# EAGLE board 13350-Spectacle_Director_Board-panel.v10 (EAGLE 7.5.0), part 1 of 4
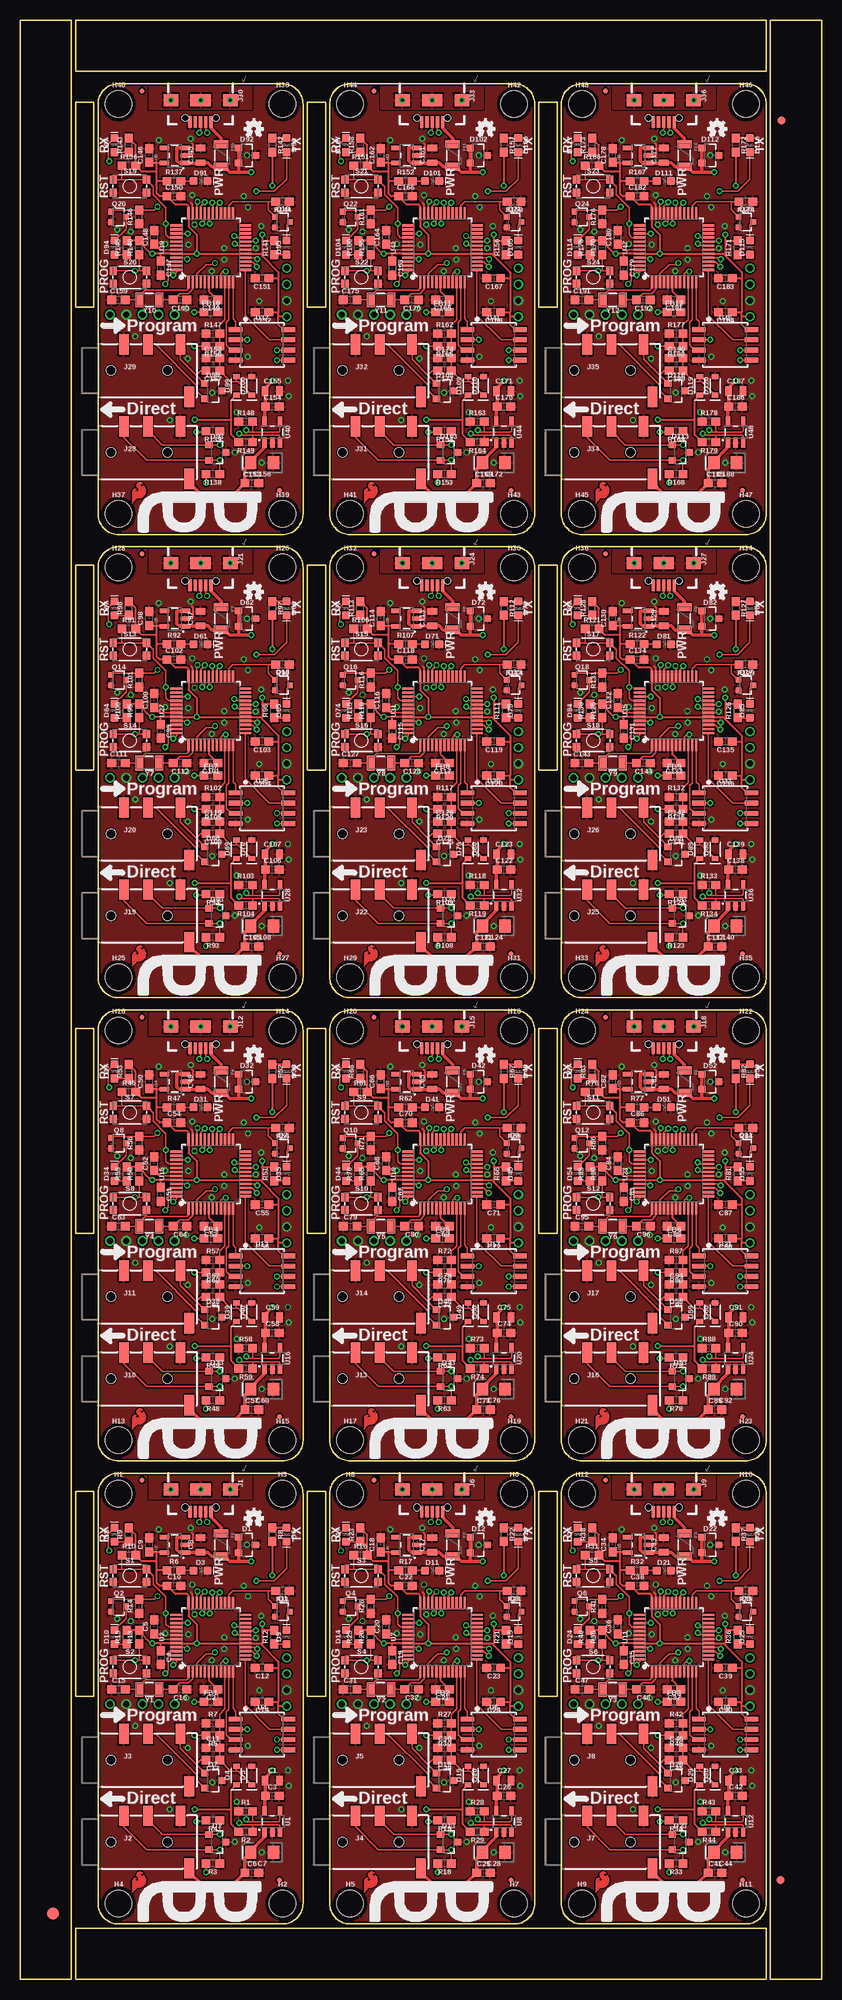
[diagram p0: board, top side]
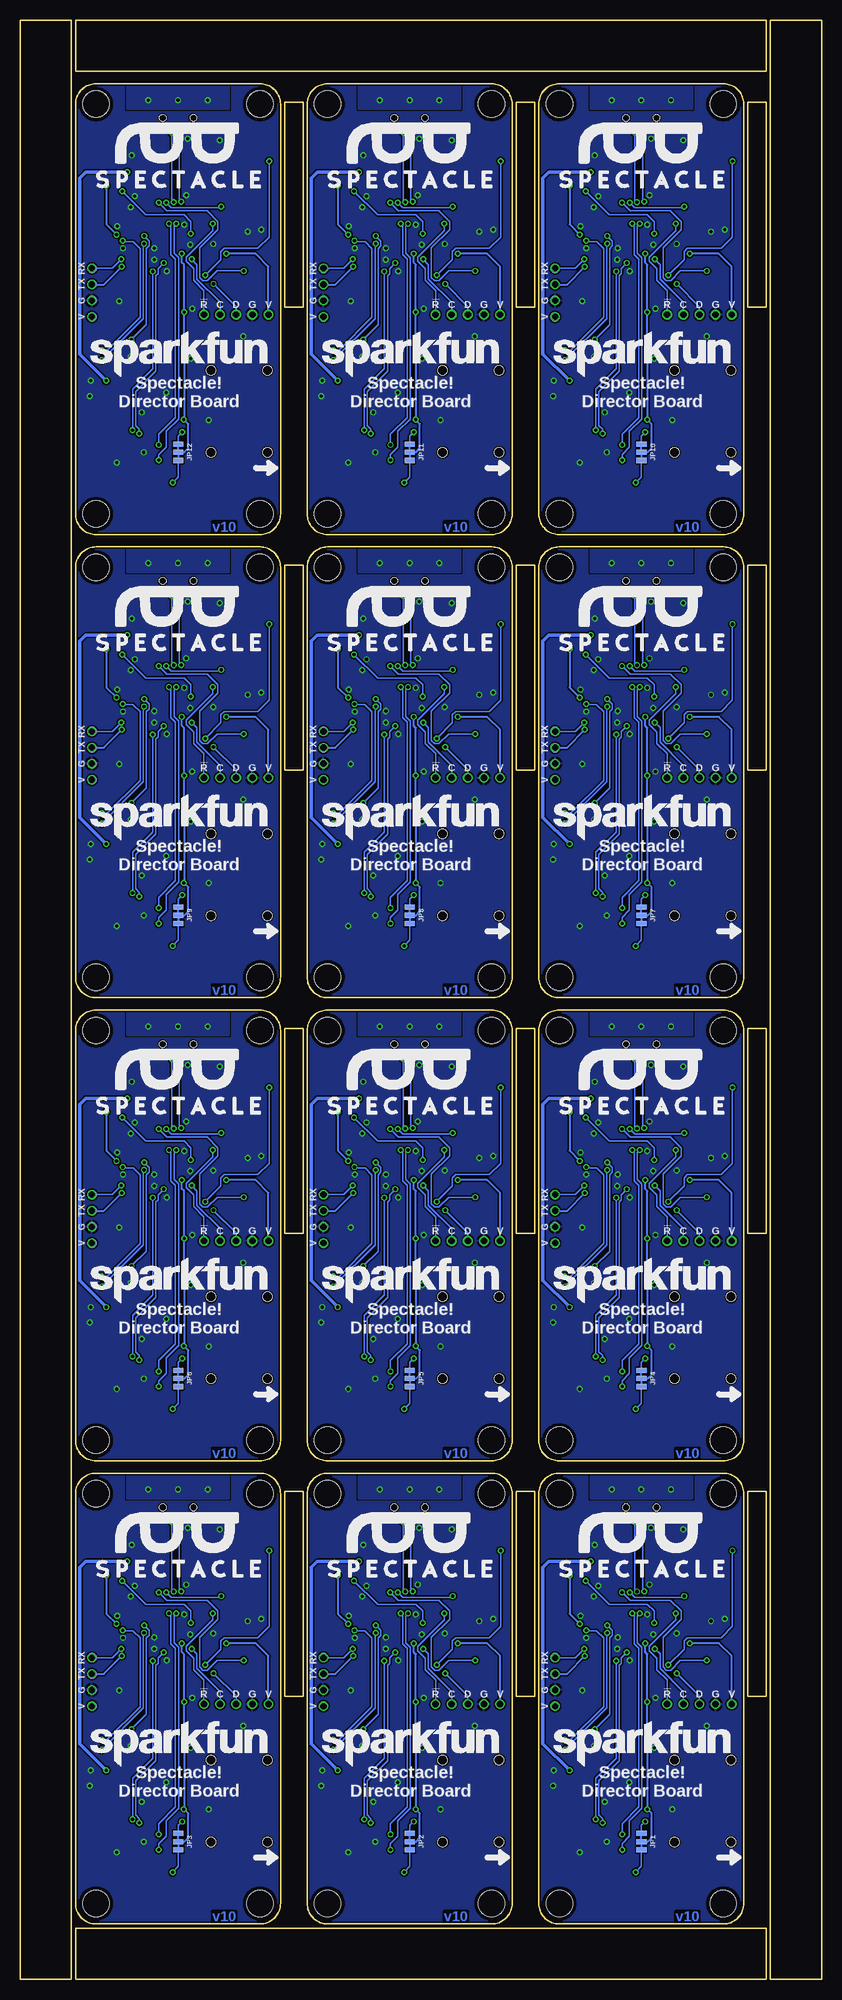
[diagram p1: board, bottom side, seen from below]

Size 99.31 x 242.82 mm. Coordinates in mm from the lower left corner, seen from the top.
Outline: 6.35,78.99 6.35,0 0,0 0,29.46
Outline: 0,26.92 0,242.82 6.35,242.82 6.35,76.45
Outline: 79.25,0 6.86,0 6.86,6.35 29.72,6.35
Outline: 27.18,6.35 92.46,6.35 92.46,0 76.71,0
Outline: 20.32,242.82 92.46,242.82 92.46,236.47 69.85,236.47
Outline: 72.39,236.47 6.86,236.47 6.86,242.82 22.86,242.82
Outline: 92.96,170.43 92.96,242.82 99.31,242.82 99.31,219.96
Outline: 99.31,222.5 99.31,0 92.96,0 92.96,172.97
Outline: 32.51,6.86 12.19,6.86 arc-90 9.65,9.4 9.65,60.2 arc-90 12.19,62.74 32.51,62.74 arc-90 35.05,60.2 35.05,9.4 arc-90 32.51,6.86
Outline: 9.14,35.05 9.14,60.45 6.86,60.45 6.86,35.05 9.14,35.05
Outline: 61.21,6.86 40.89,6.86 arc-90 38.35,9.4 38.35,60.2 arc-90 40.89,62.74 61.21,62.74 arc-90 63.75,60.2 63.75,9.4 arc-90 61.21,6.86
Outline: 37.85,35.05 37.85,60.45 35.56,60.45 35.56,35.05 37.85,35.05
Outline: 89.92,6.86 69.6,6.86 arc-90 67.06,9.4 67.06,60.2 arc-90 69.6,62.74 89.92,62.74 arc-90 92.46,60.2 92.46,9.4 arc-90 89.92,6.86
Outline: 66.55,35.05 66.55,60.45 64.26,60.45 64.26,35.05 66.55,35.05
Outline: 32.51,64.26 12.19,64.26 arc-90 9.65,66.8 9.65,117.6 arc-90 12.19,120.14 32.51,120.14 arc-90 35.05,117.6 35.05,66.8 arc-90 32.51,64.26
Outline: 9.14,92.46 9.14,117.86 6.86,117.86 6.86,92.46 9.14,92.46
Outline: 61.21,64.26 40.89,64.26 arc-90 38.35,66.8 38.35,117.6 arc-90 40.89,120.14 61.21,120.14 arc-90 63.75,117.6 63.75,66.8 arc-90 61.21,64.26
Outline: 37.85,92.46 37.85,117.86 35.56,117.86 35.56,92.46 37.85,92.46
Outline: 89.92,64.26 69.6,64.26 arc-90 67.06,66.8 67.06,117.6 arc-90 69.6,120.14 89.92,120.14 arc-90 92.46,117.6 92.46,66.8 arc-90 89.92,64.26
Outline: 66.55,92.46 66.55,117.86 64.26,117.86 64.26,92.46 66.55,92.46
Outline: 32.51,121.67 12.19,121.67 arc-90 9.65,124.21 9.65,175.01 arc-90 12.19,177.55 32.51,177.55 arc-90 35.05,175.01 35.05,124.21 arc-90 32.51,121.67
Outline: 9.14,149.86 9.14,175.26 6.86,175.26 6.86,149.86 9.14,149.86
Outline: 61.21,121.67 40.89,121.67 arc-90 38.35,124.21 38.35,175.01 arc-90 40.89,177.55 61.21,177.55 arc-90 63.75,175.01 63.75,124.21 arc-90 61.21,121.67
Outline: 37.85,149.86 37.85,175.26 35.56,175.26 35.56,149.86 37.85,149.86
Outline: 89.92,121.67 69.6,121.67 arc-90 67.06,124.21 67.06,175.01 arc-90 69.6,177.55 89.92,177.55 arc-90 92.46,175.01 92.46,124.21 arc-90 89.92,121.67
Outline: 66.55,149.86 66.55,175.26 64.26,175.26 64.26,149.86 66.55,149.86
Outline: 32.51,179.07 12.19,179.07 arc-90 9.65,181.61 9.65,232.41 arc-90 12.19,234.95 32.51,234.95 arc-90 35.05,232.41 35.05,181.61 arc-90 32.51,179.07
Outline: 9.14,207.26 9.14,232.66 6.86,232.66 6.86,207.26 9.14,207.26
Outline: 61.21,179.07 40.89,179.07 arc-90 38.35,181.61 38.35,232.41 arc-90 40.89,234.95 61.21,234.95 arc-90 63.75,232.41 63.75,181.61 arc-90 61.21,179.07
Outline: 37.85,207.26 37.85,232.66 35.56,232.66 35.56,207.26 37.85,207.26
Outline: 89.92,179.07 69.6,179.07 arc-90 67.06,181.61 67.06,232.41 arc-90 69.6,234.95 89.92,234.95 arc-90 92.46,232.41 92.46,181.61 arc-90 89.92,179.07
Outline: 66.55,207.26 66.55,232.66 64.26,232.66 64.26,207.26 66.55,207.26
Copper layers (1*16): Top 0.035mm / dielectric 1.5mm / Bottom 0.035mm
Design rules "SparkFun-2-layer-TIGHT": minimum track width 7mil, minimum drill 15mil, track to track 7mil, track to pad 7mil, pad to pad 7mil, via to via 7mil, smd to smd 7mil, copper to edge 7mil, drill to drill 7mil, minimum pad ring 7mil, minimum via ring 7mil, stop-mask expansion 4mil, vias tented up to drill 25mil, thermal gap 10mil

## Footprints (pad centres in the part's own frame; a part is rotated, then mirrored left to right if it is on the bottom)
0805 = smd 0.8 x 1.2: 1 -0.9,0; 2 0.9,0
0603 = smd 1.1 x 1: 1 -0.85,0; 2 0.85,0
EIA3216 = smd 1.4 x 1.6: + 1.4,0; - -1.4,0
SOT23-3 = smd 0.8 x 0.9: 1 -0.95,-1; 2 0.95,-1; 3 0,1.1
LED-0603 = smd 1 x 1: A -0.877,0; C 0.877,0
SOD-323 = smd 0.63 x 0.83: A 1.15,0; C -1.15,0
FIDUCIAL-1.5X3 = smd 1.5 x 1.5: 1 0,0
FIDUCIAL-1X2 = smd 1 x 1: 1 0,0
PTC-1206 = smd 1 x 1.8: 1 -1.4,0; 2 1.4,0
FIDUCIAL-MICRO = smd 0.635 x 0.635: 1 0,0
STAND-OFF = hole 3.302: 0,0
USB-B-MICRO-SMD = smd 1.45 x 0.4: D+ 2.725,0; D- 2.725,0.65; GND 2.725,-1.3; ID 2.725,-0.65; VBUS 2.725,1.3 | smd 1.5 x 1.8: SHIELD1 0,3.685; SHIELD2 0,-3.685 | smd 1.5 x 2.5: SHIELD3 0,0 | hole 0.85: 2.2,1.9; 2.2,-1.9
AUDIO_JACK_3.5MM_TRRS_SMD_RA = smd 1.2 x 2.5: EARTH 11.3,-3.25; RING1 6.2,3.25; RING2 3.2,3.25; TIP 10.2,3.25 | hole 1.2: 1.6,0; 8.6,0
SMT-JUMPER_3_2-NC_TRACE_NO-SILK = smd 0.635 x 1.27: 1 -1.016,0; 2 0,0; 3 1.016,0
SOT323 = smd 0.7 x 0.7: 1 -0.65,-0.925; 2 0.65,-0.925; 3 0,0.925
TACTILE_SWITCH_SMD_4.6X2.8MM = smd 0.9 x 1: 1 -2.05,-0.8; 2 2.05,-0.8; 3 2.05,0.8; 4 -2.05,0.8
PAD.03X.05 = smd 1.27 x 1.27: P$1 0,0
SOT23-5 = smd 0.55 x 1.2: 1 -0.95,-1.3; 2 0,-1.3; 3 0.95,-1.3; 4 0.95,1.3; 5 -0.95,1.3
TQFP-48 = smd 1.5 x 0.28: 1 -4.25,2.75; 2 -4.25,2.25; 3 -4.25,1.75; 4 -4.25,1.25; 5 -4.25,0.75; 6 -4.25,0.25; 7 -4.25,-0.25; 8 -4.25,-0.75; 9 -4.25,-1.25; 10 -4.25,-1.75; 11 -4.25,-2.25; 12 -4.25,-2.75; 25 4.25,-2.75; 26 4.25,-2.25; 27 4.25,-1.75; 28 4.25,-1.25; 29 4.25,-0.75; 30 4.25,-0.25; 31 4.25,0.25; 32 4.25,0.75; 33 4.25,1.25; 34 4.25,1.75; 35 4.25,2.25; 36 4.25,2.75 | smd 0.28 x 1.5: 13 -2.75,-4.25; 14 -2.25,-4.25; 15 -1.75,-4.25; 16 -1.25,-4.25; 17 -0.75,-4.25; 18 -0.25,-4.25; 19 0.25,-4.25; 20 0.75,-4.25; 21 1.25,-4.25; 22 1.75,-4.25; 23 2.25,-4.25; 24 2.75,-4.25; 37 2.75,4.25; 38 2.25,4.25; 39 1.75,4.25; 40 1.25,4.25; 41 0.75,4.25; 42 0.25,4.25; 43 -0.25,4.25; 44 -0.75,4.25; 45 -1.25,4.25; 46 -1.75,4.25; 47 -2.25,4.25; 48 -2.75,4.25
SOIC-8 = smd 0.61 x 1.702: 1 -1.905,-3.251; 2 -0.635,-3.251; 3 0.635,-3.251; 4 1.905,-3.251; 5 1.905,3.251; 6 0.635,3.251; 7 -0.635,3.251; 8 -1.905,3.251
CRYSTAL-SMD-3.2X1.5MM = smd 1 x 1.8: P$1 -1.25,0; P$2 1.25,0

## Placement (x,y rotation side)
C1  10uF  [0805]  31.24,24.64 0 top
C2  0.1uF  [0603]  23.62,35.94 180 top
C3  0.1uF  [0603]  31.24,22.73 0 top
C4  0.1uF  [0603]  17.4,39.88 270 top
C5  0.1uF  [0603]  16.64,43.69 90 top
C6  0.1uF  [0603]  28.7,13.21 0 top
C7  10uF  [EIA3216]  29.97,15.75 180 top
C8  1.0uF  [0805]  22.35,53.85 90 top
C9  2.2uF  [0603]  16,53.85 90 top
C10  0.1uF  [0603]  19.05,48.77 0 top
C11  47pF  [0603]  23.88,28.7 0 top
C12  0.1uF  [0603]  29.97,38.61 180 top
C13  0.22uF  [0603]  23.88,27.18 180 top
C14  0.1uF  [0603]  29.97,34.42 180 top
C15  15pF  [0603]  12.19,35.94 0 top
C16  15pF  [0603]  19.81,35.94 180 top
C17  1.0uF  [0805]  51.05,53.85 90 top
C18  2.2uF  [0603]  44.7,53.85 90 top
C19  0.1uF  [0603]  46.1,39.88 270 top
C20  0.1uF  [0603]  45.34,43.69 90 top
C21  0.1uF  [0603]  52.32,35.94 180 top
C22  0.1uF  [0603]  47.75,48.77 0 top
C23  0.1uF  [0603]  58.67,38.61 180 top
C24  0.1uF  [0603]  58.67,34.42 180 top
C25  0.1uF  [0603]  57.4,13.21 0 top
C26  0.1uF  [0603]  59.94,22.73 0 top
C27  10uF  [0805]  59.94,24.64 0 top
C28  10uF  [EIA3216]  58.67,15.75 180 top
C29  0.22uF  [0603]  52.58,27.18 180 top
C30  47pF  [0603]  52.58,28.7 0 top
C31  15pF  [0603]  40.89,35.94 0 top
C32  15pF  [0603]  48.51,35.94 180 top
C33  1.0uF  [0805]  79.76,53.85 90 top
C34  2.2uF  [0603]  73.41,53.85 90 top
C35  0.1uF  [0603]  74.8,39.88 270 top
C36  0.1uF  [0603]  74.04,43.69 90 top
C37  0.1uF  [0603]  81.03,35.94 180 top
C38  0.1uF  [0603]  76.45,48.77 0 top
C39  0.1uF  [0603]  87.38,38.61 180 top
C40  0.1uF  [0603]  87.38,34.42 180 top
C41  0.1uF  [0603]  86.11,13.21 0 top
C42  0.1uF  [0603]  88.65,22.73 0 top
C43  10uF  [0805]  88.65,24.64 0 top
C44  10uF  [EIA3216]  87.38,15.75 180 top
C45  0.22uF  [0603]  81.28,27.18 180 top
C46  47pF  [0603]  81.28,28.7 0 top
C47  15pF  [0603]  69.6,35.94 0 top
C48  15pF  [0603]  77.22,35.94 180 top
C49  1.0uF  [0805]  22.35,111.25 90 top
C50  2.2uF  [0603]  16,111.25 90 top
C51  0.1uF  [0603]  17.4,97.28 270 top
C52  0.1uF  [0603]  16.64,101.09 90 top
C53  0.1uF  [0603]  23.62,93.34 180 top
C54  0.1uF  [0603]  19.05,106.17 0 top
C55  0.1uF  [0603]  29.97,96.01 180 top
C56  0.1uF  [0603]  29.97,91.82 180 top
C57  0.1uF  [0603]  28.7,70.61 0 top
C58  0.1uF  [0603]  31.24,80.14 0 top
C59  10uF  [0805]  31.24,82.04 0 top
C60  10uF  [EIA3216]  29.97,73.15 180 top
C61  0.22uF  [0603]  23.88,84.58 180 top
C62  47pF  [0603]  23.88,86.11 0 top
C63  15pF  [0603]  12.19,93.34 0 top
C64  15pF  [0603]  19.81,93.34 180 top
C65  1.0uF  [0805]  51.05,111.25 90 top
C66  2.2uF  [0603]  44.7,111.25 90 top
C67  0.1uF  [0603]  46.1,97.28 270 top
C68  0.1uF  [0603]  45.34,101.09 90 top
C69  0.1uF  [0603]  52.32,93.34 180 top
C70  0.1uF  [0603]  47.75,106.17 0 top
C71  0.1uF  [0603]  58.67,96.01 180 top
C72  0.1uF  [0603]  58.67,91.82 180 top
C73  0.1uF  [0603]  57.4,70.61 0 top
C74  0.1uF  [0603]  59.94,80.14 0 top
C75  10uF  [0805]  59.94,82.04 0 top
C76  10uF  [EIA3216]  58.67,73.15 180 top
C77  0.22uF  [0603]  52.58,84.58 180 top
C78  47pF  [0603]  52.58,86.11 0 top
C79  15pF  [0603]  40.89,93.34 0 top
C80  15pF  [0603]  48.51,93.34 180 top
C81  1.0uF  [0805]  79.76,111.25 90 top
C82  2.2uF  [0603]  73.41,111.25 90 top
C83  0.1uF  [0603]  74.8,97.28 270 top
C84  0.1uF  [0603]  74.04,101.09 90 top
C85  0.1uF  [0603]  81.03,93.34 180 top
C86  0.1uF  [0603]  76.45,106.17 0 top
C87  0.1uF  [0603]  87.38,96.01 180 top
C88  0.1uF  [0603]  87.38,91.82 180 top
C89  0.1uF  [0603]  86.11,70.61 0 top
C90  0.1uF  [0603]  88.65,80.14 0 top
C91  10uF  [0805]  88.65,82.04 0 top
C92  10uF  [EIA3216]  87.38,73.15 180 top
C93  0.22uF  [0603]  81.28,84.58 180 top
C94  47pF  [0603]  81.28,86.11 0 top
C95  15pF  [0603]  69.6,93.34 0 top
C96  15pF  [0603]  77.22,93.34 180 top
C97  1.0uF  [0805]  22.35,168.66 90 top
C98  2.2uF  [0603]  16,168.66 90 top
C99  0.1uF  [0603]  17.4,154.69 270 top
C100  0.1uF  [0603]  16.64,158.5 90 top
C101  0.1uF  [0603]  23.62,150.75 180 top
C102  0.1uF  [0603]  19.05,163.58 0 top
C103  0.1uF  [0603]  29.97,153.42 180 top
C104  0.1uF  [0603]  29.97,149.22 180 top
C105  0.1uF  [0603]  28.7,128.02 0 top
C106  0.1uF  [0603]  31.24,137.54 0 top
C107  10uF  [0805]  31.24,139.45 0 top
C108  10uF  [EIA3216]  29.97,130.56 180 top
C109  0.22uF  [0603]  23.88,141.99 180 top
C110  47pF  [0603]  23.88,143.51 0 top
C111  15pF  [0603]  12.19,150.75 0 top
C112  15pF  [0603]  19.81,150.75 180 top
C113  1.0uF  [0805]  51.05,168.66 90 top
C114  2.2uF  [0603]  44.7,168.66 90 top
C115  0.1uF  [0603]  46.1,154.69 270 top
C116  0.1uF  [0603]  45.34,158.5 90 top
C117  0.1uF  [0603]  52.32,150.75 180 top
C118  0.1uF  [0603]  47.75,163.58 0 top
C119  0.1uF  [0603]  58.67,153.42 180 top
C120  0.1uF  [0603]  58.67,149.22 180 top
C121  0.1uF  [0603]  57.4,128.02 0 top
C122  0.1uF  [0603]  59.94,137.54 0 top
C123  10uF  [0805]  59.94,139.45 0 top
C124  10uF  [EIA3216]  58.67,130.56 180 top
C125  0.22uF  [0603]  52.58,141.99 180 top
C126  47pF  [0603]  52.58,143.51 0 top
C127  15pF  [0603]  40.89,150.75 0 top
C128  15pF  [0603]  48.51,150.75 180 top
C129  1.0uF  [0805]  79.76,168.66 90 top
C130  2.2uF  [0603]  73.41,168.66 90 top
C131  0.1uF  [0603]  74.8,154.69 270 top
C132  0.1uF  [0603]  74.04,158.5 90 top
C133  0.1uF  [0603]  81.03,150.75 180 top
C134  0.1uF  [0603]  76.45,163.58 0 top
C135  0.1uF  [0603]  87.38,153.42 180 top
C136  0.1uF  [0603]  87.38,149.22 180 top
C137  0.1uF  [0603]  86.11,128.02 0 top
C138  0.1uF  [0603]  88.65,137.54 0 top
C139  10uF  [0805]  88.65,139.45 0 top
C140  10uF  [EIA3216]  87.38,130.56 180 top
C141  0.22uF  [0603]  81.28,141.99 180 top
C142  47pF  [0603]  81.28,143.51 0 top
C143  15pF  [0603]  69.6,150.75 0 top
C144  15pF  [0603]  77.22,150.75 180 top
C145  1.0uF  [0805]  22.35,226.06 90 top
C146  2.2uF  [0603]  16,226.06 90 top
C147  0.1uF  [0603]  17.4,212.09 270 top
C148  0.1uF  [0603]  16.64,215.9 90 top
C149  0.1uF  [0603]  23.62,208.15 180 top
C150  0.1uF  [0603]  19.05,220.98 0 top
C151  0.1uF  [0603]  29.97,210.82 180 top
C152  0.1uF  [0603]  29.97,206.63 180 top
C153  0.1uF  [0603]  28.7,185.42 0 top
C154  0.1uF  [0603]  31.24,194.94 0 top
C155  10uF  [0805]  31.24,196.85 0 top
C156  10uF  [EIA3216]  29.97,187.96 180 top
C157  0.22uF  [0603]  23.88,199.39 180 top
C158  47pF  [0603]  23.88,200.91 0 top
C159  15pF  [0603]  12.19,208.15 0 top
C160  15pF  [0603]  19.81,208.15 180 top
C161  1.0uF  [0805]  51.05,226.06 90 top
C162  2.2uF  [0603]  44.7,226.06 90 top
C163  0.1uF  [0603]  46.1,212.09 270 top
C164  0.1uF  [0603]  45.34,215.9 90 top
C165  0.1uF  [0603]  52.32,208.15 180 top
C166  0.1uF  [0603]  47.75,220.98 0 top
C167  0.1uF  [0603]  58.67,210.82 180 top
C168  0.1uF  [0603]  58.67,206.63 180 top
C169  0.1uF  [0603]  57.4,185.42 0 top
C170  0.1uF  [0603]  59.94,194.94 0 top
C171  10uF  [0805]  59.94,196.85 0 top
C172  10uF  [EIA3216]  58.67,187.96 180 top
C173  0.22uF  [0603]  52.58,199.39 180 top
C174  47pF  [0603]  52.58,200.91 0 top
C175  15pF  [0603]  40.89,208.15 0 top
C176  15pF  [0603]  48.51,208.15 180 top
C177  1.0uF  [0805]  79.76,226.06 90 top
C178  2.2uF  [0603]  73.41,226.06 90 top
C179  0.1uF  [0603]  74.8,212.09 270 top
C180  0.1uF  [0603]  74.04,215.9 90 top
C181  0.1uF  [0603]  81.03,208.15 180 top
C182  0.1uF  [0603]  76.45,220.98 0 top
C183  0.1uF  [0603]  87.38,210.82 180 top
C184  0.1uF  [0603]  87.38,206.63 180 top
C185  0.1uF  [0603]  86.11,185.42 0 top
C186  0.1uF  [0603]  88.65,194.94 0 top
C187  10uF  [0805]  88.65,196.85 0 top
C188  10uF  [EIA3216]  87.38,187.96 180 top
C189  0.22uF  [0603]  81.28,199.39 180 top
C190  47pF  [0603]  81.28,200.91 0 top
C191  15pF  [0603]  69.6,208.15 0 top
C192  15pF  [0603]  77.22,208.15 180 top
D1  PESD1CAN  [SOT23-3]  28.07,53.85 270 top
D2  PESD1CAN  [SOT23-3]  24.38,17.02 270 top
D3  RED  [LED-0603]  22.35,50.67 0 top
D4  0.5A/40V/420mV  [SOD-323]  26.8,25.27 90 top
D5  0.5A/40V/420mV  [SOD-323]  28.7,25.27 90 top
D6  GREEN  [LED-0603]  33.02,55.12 270 top
D7  PESD1CAN  [SOT23-3]  23.88,24.64 270 top
D8  Yellow  [LED-0603]  11.68,55.12 90 top
D9  BLUE  [LED-0603]  33.02,42.42 90 top
D10  GREEN  [LED-0603]  11.68,42.42 90 top
D11  RED  [LED-0603]  51.05,50.67 0 top
D12  PESD1CAN  [SOT23-3]  56.77,53.85 270 top
D13  PESD1CAN  [SOT23-3]  53.09,17.02 270 top
D14  GREEN  [LED-0603]  40.39,42.42 90 top
D15  BLUE  [LED-0603]  61.72,42.42 90 top
D16  GREEN  [LED-0603]  61.72,55.12 270 top
D17  Yellow  [LED-0603]  40.39,55.12 90 top
D18  PESD1CAN  [SOT23-3]  52.58,24.64 270 top
D19  0.5A/40V/420mV  [SOD-323]  55.5,25.27 90 top
D20  0.5A/40V/420mV  [SOD-323]  57.4,25.27 90 top
D21  RED  [LED-0603]  79.76,50.67 0 top
D22  PESD1CAN  [SOT23-3]  85.47,53.85 270 top
D23  PESD1CAN  [SOT23-3]  81.79,17.02 270 top
D24  GREEN  [LED-0603]  69.09,42.42 90 top
D25  BLUE  [LED-0603]  90.42,42.42 90 top
D26  GREEN  [LED-0603]  90.42,55.12 270 top
D27  Yellow  [LED-0603]  69.09,55.12 90 top
D28  PESD1CAN  [SOT23-3]  81.28,24.64 270 top
D29  0.5A/40V/420mV  [SOD-323]  84.2,25.27 90 top
D30  0.5A/40V/420mV  [SOD-323]  86.11,25.27 90 top
D31  RED  [LED-0603]  22.35,108.08 0 top
D32  PESD1CAN  [SOT23-3]  28.07,111.25 270 top
D33  PESD1CAN  [SOT23-3]  24.38,74.42 270 top
D34  GREEN  [LED-0603]  11.68,99.82 90 top
D35  BLUE  [LED-0603]  33.02,99.82 90 top
D36  GREEN  [LED-0603]  33.02,112.52 270 top
D37  Yellow  [LED-0603]  11.68,112.52 90 top
D38  PESD1CAN  [SOT23-3]  23.88,82.04 270 top
D39  0.5A/40V/420mV  [SOD-323]  26.8,82.68 90 top
D40  0.5A/40V/420mV  [SOD-323]  28.7,82.68 90 top
D41  RED  [LED-0603]  51.05,108.08 0 top
D42  PESD1CAN  [SOT23-3]  56.77,111.25 270 top
D43  PESD1CAN  [SOT23-3]  53.09,74.42 270 top
D44  GREEN  [LED-0603]  40.39,99.82 90 top
D45  BLUE  [LED-0603]  61.72,99.82 90 top
D46  GREEN  [LED-0603]  61.72,112.52 270 top
D47  Yellow  [LED-0603]  40.39,112.52 90 top
D48  PESD1CAN  [SOT23-3]  52.58,82.04 270 top
D49  0.5A/40V/420mV  [SOD-323]  55.5,82.68 90 top
D50  0.5A/40V/420mV  [SOD-323]  57.4,82.68 90 top
D51  RED  [LED-0603]  79.76,108.08 0 top
D52  PESD1CAN  [SOT23-3]  85.47,111.25 270 top
D53  PESD1CAN  [SOT23-3]  81.79,74.42 270 top
D54  GREEN  [LED-0603]  69.09,99.82 90 top
D55  BLUE  [LED-0603]  90.42,99.82 90 top
D56  GREEN  [LED-0603]  90.42,112.52 270 top
D57  Yellow  [LED-0603]  69.09,112.52 90 top
D58  PESD1CAN  [SOT23-3]  81.28,82.04 270 top
D59  0.5A/40V/420mV  [SOD-323]  84.2,82.68 90 top
D60  0.5A/40V/420mV  [SOD-323]  86.11,82.68 90 top
D61  RED  [LED-0603]  22.35,165.48 0 top
D62  PESD1CAN  [SOT23-3]  28.07,168.66 270 top
D63  PESD1CAN  [SOT23-3]  24.38,131.83 270 top
D64  GREEN  [LED-0603]  11.68,157.23 90 top
D65  BLUE  [LED-0603]  33.02,157.23 90 top
D66  GREEN  [LED-0603]  33.02,169.93 270 top
D67  Yellow  [LED-0603]  11.68,169.93 90 top
D68  PESD1CAN  [SOT23-3]  23.88,139.45 270 top
D69  0.5A/40V/420mV  [SOD-323]  26.8,140.08 90 top
D70  0.5A/40V/420mV  [SOD-323]  28.7,140.08 90 top
D71  RED  [LED-0603]  51.05,165.48 0 top
D72  PESD1CAN  [SOT23-3]  56.77,168.66 270 top
D73  PESD1CAN  [SOT23-3]  53.09,131.83 270 top
D74  GREEN  [LED-0603]  40.39,157.23 90 top
D75  BLUE  [LED-0603]  61.72,157.23 90 top
D76  GREEN  [LED-0603]  61.72,169.93 270 top
D77  Yellow  [LED-0603]  40.39,169.93 90 top
D78  PESD1CAN  [SOT23-3]  52.58,139.45 270 top
D79  0.5A/40V/420mV  [SOD-323]  55.5,140.08 90 top
D80  0.5A/40V/420mV  [SOD-323]  57.4,140.08 90 top
D81  RED  [LED-0603]  79.76,165.48 0 top
D82  PESD1CAN  [SOT23-3]  85.47,168.66 270 top
D83  PESD1CAN  [SOT23-3]  81.79,131.83 270 top
D84  GREEN  [LED-0603]  69.09,157.23 90 top
D85  BLUE  [LED-0603]  90.42,157.23 90 top
D86  GREEN  [LED-0603]  90.42,169.93 270 top
D87  Yellow  [LED-0603]  69.09,169.93 90 top
D88  PESD1CAN  [SOT23-3]  81.28,139.45 270 top
D89  0.5A/40V/420mV  [SOD-323]  84.2,140.08 90 top
D90  0.5A/40V/420mV  [SOD-323]  86.11,140.08 90 top
D91  RED  [LED-0603]  22.35,222.88 0 top
D92  PESD1CAN  [SOT23-3]  28.07,226.06 270 top
D93  PESD1CAN  [SOT23-3]  24.38,189.23 270 top
D94  GREEN  [LED-0603]  11.68,214.63 90 top
D95  BLUE  [LED-0603]  33.02,214.63 90 top
D96  GREEN  [LED-0603]  33.02,227.33 270 top
D97  Yellow  [LED-0603]  11.68,227.33 90 top
D98  PESD1CAN  [SOT23-3]  23.88,196.85 270 top
D99  0.5A/40V/420mV  [SOD-323]  26.8,197.49 90 top
D100  0.5A/40V/420mV  [SOD-323]  28.7,197.49 90 top
D101  RED  [LED-0603]  51.05,222.88 0 top
D102  PESD1CAN  [SOT23-3]  56.77,226.06 270 top
D103  PESD1CAN  [SOT23-3]  53.09,189.23 270 top
D104  GREEN  [LED-0603]  40.39,214.63 90 top
D105  BLUE  [LED-0603]  61.72,214.63 90 top
D106  GREEN  [LED-0603]  61.72,227.33 270 top
D107  Yellow  [LED-0603]  40.39,227.33 90 top
D108  PESD1CAN  [SOT23-3]  52.58,196.85 270 top
D109  0.5A/40V/420mV  [SOD-323]  55.5,197.49 90 top
D110  0.5A/40V/420mV  [SOD-323]  57.4,197.49 90 top
D111  RED  [LED-0603]  79.76,222.88 0 top
D112  PESD1CAN  [SOT23-3]  85.47,226.06 270 top
D113  PESD1CAN  [SOT23-3]  81.79,189.23 270 top
D114  GREEN  [LED-0603]  69.09,214.63 90 top
D115  BLUE  [LED-0603]  90.42,214.63 90 top
D116  GREEN  [LED-0603]  90.42,227.33 270 top
D117  Yellow  [LED-0603]  69.09,227.33 90 top
D118  PESD1CAN  [SOT23-3]  81.28,196.85 270 top
D119  0.5A/40V/420mV  [SOD-323]  84.2,197.49 90 top
D120  0.5A/40V/420mV  [SOD-323]  86.11,197.49 90 top
E$1  [FIDUCIAL-1.5X3]  4.06,8.13 0 top
E$4  [FIDUCIAL-1X2]  94.23,12.32 90 top
E$7  [FIDUCIAL-1X2]  94.36,230.38 180 top
F1  500mA  [PTC-1206]  24.89,53.85 270 top
F2  500mA  [PTC-1206]  53.59,53.85 270 top
F3  500mA  [PTC-1206]  82.3,53.85 270 top
F4  500mA  [PTC-1206]  24.89,111.25 270 top
F5  500mA  [PTC-1206]  53.59,111.25 270 top
F6  500mA  [PTC-1206]  82.3,111.25 270 top
F7  500mA  [PTC-1206]  24.89,168.66 270 top
F8  500mA  [PTC-1206]  53.59,168.66 270 top
F9  500mA  [PTC-1206]  82.3,168.66 270 top
F10  500mA  [PTC-1206]  24.89,226.06 270 top
F11  500mA  [PTC-1206]  53.59,226.06 270 top
F12  500mA  [PTC-1206]  82.3,226.06 270 top
FB1  30Ω/1.8A  [0603]  23.62,34.42 0 top
FB2  30Ω/1.8A  [0603]  52.32,34.42 0 top
FB3  30Ω/1.8A  [0603]  81.03,34.42 0 top
FB4  30Ω/1.8A  [0603]  23.62,91.82 0 top
FB5  30Ω/1.8A  [0603]  52.32,91.82 0 top
FB6  30Ω/1.8A  [0603]  81.03,91.82 0 top
FB7  30Ω/1.8A  [0603]  23.62,149.22 0 top
FB8  30Ω/1.8A  [0603]  52.32,149.22 0 top
FB9  30Ω/1.8A  [0603]  81.03,149.22 0 top
FB10  30Ω/1.8A  [0603]  23.62,206.63 0 top
FB11  30Ω/1.8A  [0603]  52.32,206.63 0 top
FB12  30Ω/1.8A  [0603]  81.03,206.63 0 top
FD1  FIDUCIALUFIDUCIAL  [FIDUCIAL-MICRO]  15.11,61.85 0 top
FD2  FIDUCIALUFIDUCIAL  [FIDUCIAL-MICRO]  32.13,12.32 0 top
FD3  FIDUCIALUFIDUCIAL  [FIDUCIAL-MICRO]  60.83,12.32 0 top
FD4  FIDUCIALUFIDUCIAL  [FIDUCIAL-MICRO]  43.81,61.85 0 top
FD5  FIDUCIALUFIDUCIAL  [FIDUCIAL-MICRO]  89.53,12.32 0 top
FD6  FIDUCIALUFIDUCIAL  [FIDUCIAL-MICRO]  72.52,61.85 0 top
FD7  FIDUCIALUFIDUCIAL  [FIDUCIAL-MICRO]  32.13,69.72 0 top
FD8  FIDUCIALUFIDUCIAL  [FIDUCIAL-MICRO]  15.11,119.25 0 top
FD9  FIDUCIALUFIDUCIAL  [FIDUCIAL-MICRO]  60.83,69.72 0 top
FD10  FIDUCIALUFIDUCIAL  [FIDUCIAL-MICRO]  43.81,119.25 0 top
FD11  FIDUCIALUFIDUCIAL  [FIDUCIAL-MICRO]  89.53,69.72 0 top
FD12  FIDUCIALUFIDUCIAL  [FIDUCIAL-MICRO]  72.52,119.25 0 top
FD13  FIDUCIALUFIDUCIAL  [FIDUCIAL-MICRO]  32.13,127.13 0 top
FD14  FIDUCIALUFIDUCIAL  [FIDUCIAL-MICRO]  15.11,176.66 0 top
FD15  FIDUCIALUFIDUCIAL  [FIDUCIAL-MICRO]  60.83,127.13 0 top
FD16  FIDUCIALUFIDUCIAL  [FIDUCIAL-MICRO]  43.81,176.66 0 top
FD17  FIDUCIALUFIDUCIAL  [FIDUCIAL-MICRO]  89.53,127.13 0 top
FD18  FIDUCIALUFIDUCIAL  [FIDUCIAL-MICRO]  72.52,176.66 0 top
FD19  FIDUCIALUFIDUCIAL  [FIDUCIAL-MICRO]  32.13,184.53 0 top
FD20  FIDUCIALUFIDUCIAL  [FIDUCIAL-MICRO]  15.11,234.06 0 top
FD21  FIDUCIALUFIDUCIAL  [FIDUCIAL-MICRO]  60.83,184.53 0 top
FD22  FIDUCIALUFIDUCIAL  [FIDUCIAL-MICRO]  43.81,234.06 0 top
FD23  FIDUCIALUFIDUCIAL  [FIDUCIAL-MICRO]  89.53,184.53 0 top
FD24  FIDUCIALUFIDUCIAL  [FIDUCIAL-MICRO]  72.52,234.06 0 top
H1  STAND-OFF  [STAND-OFF]  12.19,60.2 0 top
H2  STAND-OFF  [STAND-OFF]  32.51,9.4 0 top
H3  STAND-OFF  [STAND-OFF]  32.51,60.2 0 top
H4  STAND-OFF  [STAND-OFF]  12.19,9.4 0 top
H5  STAND-OFF  [STAND-OFF]  40.89,9.4 0 top
H6  STAND-OFF  [STAND-OFF]  61.21,60.2 0 top
H7  STAND-OFF  [STAND-OFF]  61.21,9.4 0 top
H8  STAND-OFF  [STAND-OFF]  40.89,60.2 0 top
H9  STAND-OFF  [STAND-OFF]  69.6,9.4 0 top
H10  STAND-OFF  [STAND-OFF]  89.92,60.2 0 top
H11  STAND-OFF  [STAND-OFF]  89.92,9.4 0 top
H12  STAND-OFF  [STAND-OFF]  69.6,60.2 0 top
H13  STAND-OFF  [STAND-OFF]  12.19,66.8 0 top
H14  STAND-OFF  [STAND-OFF]  32.51,117.6 0 top
H15  STAND-OFF  [STAND-OFF]  32.51,66.8 0 top
H16  STAND-OFF  [STAND-OFF]  12.19,117.6 0 top
H17  STAND-OFF  [STAND-OFF]  40.89,66.8 0 top
H18  STAND-OFF  [STAND-OFF]  61.21,117.6 0 top
H19  STAND-OFF  [STAND-OFF]  61.21,66.8 0 top
H20  STAND-OFF  [STAND-OFF]  40.89,117.6 0 top
H21  STAND-OFF  [STAND-OFF]  69.6,66.8 0 top
H22  STAND-OFF  [STAND-OFF]  89.92,117.6 0 top
H23  STAND-OFF  [STAND-OFF]  89.92,66.8 0 top
H24  STAND-OFF  [STAND-OFF]  69.6,117.6 0 top
H25  STAND-OFF  [STAND-OFF]  12.19,124.21 0 top
H26  STAND-OFF  [STAND-OFF]  32.51,175.01 0 top
H27  STAND-OFF  [STAND-OFF]  32.51,124.21 0 top
H28  STAND-OFF  [STAND-OFF]  12.19,175.01 0 top
H29  STAND-OFF  [STAND-OFF]  40.89,124.21 0 top
H30  STAND-OFF  [STAND-OFF]  61.21,175.01 0 top
H31  STAND-OFF  [STAND-OFF]  61.21,124.21 0 top
H32  STAND-OFF  [STAND-OFF]  40.89,175.01 0 top
H33  STAND-OFF  [STAND-OFF]  69.6,124.21 0 top
H34  STAND-OFF  [STAND-OFF]  89.92,175.01 0 top
H35  STAND-OFF  [STAND-OFF]  89.92,124.21 0 top
H36  STAND-OFF  [STAND-OFF]  69.6,175.01 0 top
H37  STAND-OFF  [STAND-OFF]  12.19,181.61 0 top
H38  STAND-OFF  [STAND-OFF]  32.51,232.41 0 top
H39  STAND-OFF  [STAND-OFF]  32.51,181.61 0 top
H40  STAND-OFF  [STAND-OFF]  12.19,232.41 0 top
H41  STAND-OFF  [STAND-OFF]  40.89,181.61 0 top
H42  STAND-OFF  [STAND-OFF]  61.21,232.41 0 top
H43  STAND-OFF  [STAND-OFF]  61.21,181.61 0 top
H44  STAND-OFF  [STAND-OFF]  40.89,232.41 0 top
H45  STAND-OFF  [STAND-OFF]  69.6,181.61 0 top
H46  STAND-OFF  [STAND-OFF]  89.92,232.41 0 top
H47  STAND-OFF  [STAND-OFF]  89.92,181.61 0 top
H48  STAND-OFF  [STAND-OFF]  69.6,232.41 0 top
J1  [USB-B-MICRO-SMD]  22.35,60.71 270 top
J2  I2C-TRRS  [AUDIO_JACK_3.5MM_TRRS_SMD_RA]  9.65,17.02 0 top
J3  Serial-TRRS  [AUDIO_JACK_3.5MM_TRRS_SMD_RA]  9.65,27.18 0 top
J4  I2C-TRRS  [AUDIO_JACK_3.5MM_TRRS_SMD_RA]  38.35,17.02 0 top
J5  Serial-TRRS  [AUDIO_JACK_3.5MM_TRRS_SMD_RA]  38.35,27.18 0 top
J6  [USB-B-MICRO-SMD]  51.05,60.71 270 top
J7  I2C-TRRS  [AUDIO_JACK_3.5MM_TRRS_SMD_RA]  67.06,17.02 0 top
J8  Serial-TRRS  [AUDIO_JACK_3.5MM_TRRS_SMD_RA]  67.06,27.18 0 top
J9  [USB-B-MICRO-SMD]  79.76,60.71 270 top
J10  I2C-TRRS  [AUDIO_JACK_3.5MM_TRRS_SMD_RA]  9.65,74.42 0 top
J11  Serial-TRRS  [AUDIO_JACK_3.5MM_TRRS_SMD_RA]  9.65,84.58 0 top
J12  [USB-B-MICRO-SMD]  22.35,118.11 270 top
J13  I2C-TRRS  [AUDIO_JACK_3.5MM_TRRS_SMD_RA]  38.35,74.42 0 top
J14  Serial-TRRS  [AUDIO_JACK_3.5MM_TRRS_SMD_RA]  38.35,84.58 0 top
J15  [USB-B-MICRO-SMD]  51.05,118.11 270 top
J16  I2C-TRRS  [AUDIO_JACK_3.5MM_TRRS_SMD_RA]  67.06,74.42 0 top
J17  Serial-TRRS  [AUDIO_JACK_3.5MM_TRRS_SMD_RA]  67.06,84.58 0 top
J18  [USB-B-MICRO-SMD]  79.76,118.11 270 top
J19  I2C-TRRS  [AUDIO_JACK_3.5MM_TRRS_SMD_RA]  9.65,131.83 0 top
J20  Serial-TRRS  [AUDIO_JACK_3.5MM_TRRS_SMD_RA]  9.65,141.99 0 top
J21  [USB-B-MICRO-SMD]  22.35,175.51 270 top
J22  I2C-TRRS  [AUDIO_JACK_3.5MM_TRRS_SMD_RA]  38.35,131.83 0 top
J23  Serial-TRRS  [AUDIO_JACK_3.5MM_TRRS_SMD_RA]  38.35,141.99 0 top
J24  [USB-B-MICRO-SMD]  51.05,175.51 270 top
J25  I2C-TRRS  [AUDIO_JACK_3.5MM_TRRS_SMD_RA]  67.06,131.83 0 top
J26  Serial-TRRS  [AUDIO_JACK_3.5MM_TRRS_SMD_RA]  67.06,141.99 0 top
J27  [USB-B-MICRO-SMD]  79.76,175.51 270 top
J28  I2C-TRRS  [AUDIO_JACK_3.5MM_TRRS_SMD_RA]  9.65,189.23 0 top
J29  Serial-TRRS  [AUDIO_JACK_3.5MM_TRRS_SMD_RA]  9.65,199.39 0 top
J30  [USB-B-MICRO-SMD]  22.35,232.92 270 top
J31  I2C-TRRS  [AUDIO_JACK_3.5MM_TRRS_SMD_RA]  38.35,189.23 0 top
J32  Serial-TRRS  [AUDIO_JACK_3.5MM_TRRS_SMD_RA]  38.35,199.39 0 top
J33  [USB-B-MICRO-SMD]  51.05,232.92 270 top
J34  I2C-TRRS  [AUDIO_JACK_3.5MM_TRRS_SMD_RA]  67.06,189.23 0 top
J35  Serial-TRRS  [AUDIO_JACK_3.5MM_TRRS_SMD_RA]  67.06,199.39 0 top
J36  [USB-B-MICRO-SMD]  79.76,232.92 270 top
JP1  JUMPER-SMT_3_2-NC_TRACE_NO-SILK  [SMT-JUMPER_3_2-NC_TRACE_NO-SILK]  22.33,17.07 270 bottom
JP2  JUMPER-SMT_3_2-NC_TRACE_NO-SILK  [SMT-JUMPER_3_2-NC_TRACE_NO-SILK]  51.03,17.07 270 bottom
JP3  JUMPER-SMT_3_2-NC_TRACE_NO-SILK  [SMT-JUMPER_3_2-NC_TRACE_NO-SILK]  79.73,17.07 270 bottom
JP4  JUMPER-SMT_3_2-NC_TRACE_NO-SILK  [SMT-JUMPER_3_2-NC_TRACE_NO-SILK]  22.33,74.47 270 bottom
JP5  JUMPER-SMT_3_2-NC_TRACE_NO-SILK  [SMT-JUMPER_3_2-NC_TRACE_NO-SILK]  51.03,74.47 270 bottom
JP6  JUMPER-SMT_3_2-NC_TRACE_NO-SILK  [SMT-JUMPER_3_2-NC_TRACE_NO-SILK]  79.73,74.47 270 bottom
JP7  JUMPER-SMT_3_2-NC_TRACE_NO-SILK  [SMT-JUMPER_3_2-NC_TRACE_NO-SILK]  22.33,131.88 270 bottom
JP8  JUMPER-SMT_3_2-NC_TRACE_NO-SILK  [SMT-JUMPER_3_2-NC_TRACE_NO-SILK]  51.03,131.88 270 bottom
JP9  JUMPER-SMT_3_2-NC_TRACE_NO-SILK  [SMT-JUMPER_3_2-NC_TRACE_NO-SILK]  79.73,131.88 270 bottom
JP10  JUMPER-SMT_3_2-NC_TRACE_NO-SILK  [SMT-JUMPER_3_2-NC_TRACE_NO-SILK]  22.33,189.28 270 bottom
JP11  JUMPER-SMT_3_2-NC_TRACE_NO-SILK  [SMT-JUMPER_3_2-NC_TRACE_NO-SILK]  51.03,189.28 270 bottom
JP12  JUMPER-SMT_3_2-NC_TRACE_NO-SILK  [SMT-JUMPER_3_2-NC_TRACE_NO-SILK]  79.73,189.28 270 bottom
LOGO1  OSHW-LOGOMINI  [OSHW-LOGO-MINI]  28.96,57.15 0 top
LOGO2  SFE_LOGO_NAME.2_INCH  [SFE_LOGO_NAME_.2]  33.15,26.42 0 bottom
LOGO3  SFE_LOGO_FLAME.1COP  [SFE_LOGO_FLAME_COPPER_.1]  13.59,10.41 0 top
LOGO4  SFE_LOGO_NAME.2_INCH  [SFE_LOGO_NAME_.2]  61.85,26.42 0 bottom
LOGO5  OSHW-LOGOMINI  [OSHW-LOGO-MINI]  57.66,57.15 0 top
LOGO6  SFE_LOGO_FLAME.1COP  [SFE_LOGO_FLAME_COPPER_.1]  42.29,10.41 0 top
LOGO7  SFE_LOGO_NAME.2_INCH  [SFE_LOGO_NAME_.2]  90.55,26.42 0 bottom
LOGO8  OSHW-LOGOMINI  [OSHW-LOGO-MINI]  86.36,57.15 0 top
LOGO9  SFE_LOGO_FLAME.1COP  [SFE_LOGO_FLAME_COPPER_.1]  70.99,10.41 0 top
LOGO10  SFE_LOGO_NAME.2_INCH  [SFE_LOGO_NAME_.2]  33.15,83.82 0 bottom
LOGO11  OSHW-LOGOMINI  [OSHW-LOGO-MINI]  28.96,114.55 0 top
LOGO12  SFE_LOGO_FLAME.1COP  [SFE_LOGO_FLAME_COPPER_.1]  13.59,67.82 0 top
LOGO13  SFE_LOGO_NAME.2_INCH  [SFE_LOGO_NAME_.2]  61.85,83.82 0 bottom
LOGO14  OSHW-LOGOMINI  [OSHW-LOGO-MINI]  57.66,114.55 0 top
LOGO15  SFE_LOGO_FLAME.1COP  [SFE_LOGO_FLAME_COPPER_.1]  42.29,67.82 0 top
LOGO16  SFE_LOGO_NAME.2_INCH  [SFE_LOGO_NAME_.2]  90.55,83.82 0 bottom
LOGO17  OSHW-LOGOMINI  [OSHW-LOGO-MINI]  86.36,114.55 0 top
LOGO18  SFE_LOGO_FLAME.1COP  [SFE_LOGO_FLAME_COPPER_.1]  70.99,67.82 0 top
LOGO19  SFE_LOGO_NAME.2_INCH  [SFE_LOGO_NAME_.2]  33.15,141.22 0 bottom
LOGO20  OSHW-LOGOMINI  [OSHW-LOGO-MINI]  28.96,171.96 0 top
LOGO21  SFE_LOGO_FLAME.1COP  [SFE_LOGO_FLAME_COPPER_.1]  13.59,125.22 0 top
LOGO22  SFE_LOGO_NAME.2_INCH  [SFE_LOGO_NAME_.2]  61.85,141.22 0 bottom
LOGO23  OSHW-LOGOMINI  [OSHW-LOGO-MINI]  57.66,171.96 0 top
LOGO24  SFE_LOGO_FLAME.1COP  [SFE_LOGO_FLAME_COPPER_.1]  42.29,125.22 0 top
LOGO25  SFE_LOGO_NAME.2_INCH  [SFE_LOGO_NAME_.2]  90.55,141.22 0 bottom
LOGO26  OSHW-LOGOMINI  [OSHW-LOGO-MINI]  86.36,171.96 0 top
LOGO27  SFE_LOGO_FLAME.1COP  [SFE_LOGO_FLAME_COPPER_.1]  70.99,125.22 0 top
LOGO28  SFE_LOGO_NAME.2_INCH  [SFE_LOGO_NAME_.2]  33.15,198.63 0 bottom
LOGO29  OSHW-LOGOMINI  [OSHW-LOGO-MINI]  28.96,229.36 0 top
LOGO30  SFE_LOGO_FLAME.1COP  [SFE_LOGO_FLAME_COPPER_.1]  13.59,182.63 0 top
LOGO31  SFE_LOGO_NAME.2_INCH  [SFE_LOGO_NAME_.2]  61.85,198.63 0 bottom
LOGO32  OSHW-LOGOMINI  [OSHW-LOGO-MINI]  57.66,229.36 0 top
LOGO33  SFE_LOGO_FLAME.1COP  [SFE_LOGO_FLAME_COPPER_.1]  42.29,182.63 0 top
LOGO34  SFE_LOGO_NAME.2_INCH  [SFE_LOGO_NAME_.2]  90.55,198.63 0 bottom
LOGO35  OSHW-LOGOMINI  [OSHW-LOGO-MINI]  86.36,229.36 0 top
LOGO36  SFE_LOGO_FLAME.1COP  [SFE_LOGO_FLAME_COPPER_.1]  70.99,182.63 0 top
Q1  310mA/60V/1.6Ω  [SOT323]  32.51,45.59 270 top
Q2  310mA/60V/1.6Ω  [SOT323]  12.19,46.23 270 top
Q3  310mA/60V/1.6Ω  [SOT323]  61.21,45.59 270 top
Q4  310mA/60V/1.6Ω  [SOT323]  40.89,46.23 270 top
Q5  310mA/60V/1.6Ω  [SOT323]  89.92,45.59 270 top
Q6  310mA/60V/1.6Ω  [SOT323]  69.6,46.23 270 top
Q7  310mA/60V/1.6Ω  [SOT323]  32.51,103 270 top
Q8  310mA/60V/1.6Ω  [SOT323]  12.19,103.63 270 top
Q9  310mA/60V/1.6Ω  [SOT323]  61.21,103 270 top
Q10  310mA/60V/1.6Ω  [SOT323]  40.89,103.63 270 top
Q11  310mA/60V/1.6Ω  [SOT323]  89.92,103 270 top
Q12  310mA/60V/1.6Ω  [SOT323]  69.6,103.63 270 top
Q13  310mA/60V/1.6Ω  [SOT323]  32.51,160.4 270 top
Q14  310mA/60V/1.6Ω  [SOT323]  12.19,161.04 270 top
Q15  310mA/60V/1.6Ω  [SOT323]  61.21,160.4 270 top
Q16  310mA/60V/1.6Ω  [SOT323]  40.89,161.04 270 top
Q17  310mA/60V/1.6Ω  [SOT323]  89.92,160.4 270 top
Q18  310mA/60V/1.6Ω  [SOT323]  69.6,161.04 270 top
Q19  310mA/60V/1.6Ω  [SOT323]  32.51,217.81 270 top
Q20  310mA/60V/1.6Ω  [SOT323]  12.19,218.44 270 top
Q21  310mA/60V/1.6Ω  [SOT323]  61.21,217.81 270 top
Q22  310mA/60V/1.6Ω  [SOT323]  40.89,218.44 270 top
Q23  310mA/60V/1.6Ω  [SOT323]  89.92,217.81 270 top
Q24  310mA/60V/1.6Ω  [SOT323]  69.6,218.44 270 top
R1  100k  [0603]  27.94,20.83 0 top
R2  10k  [0603]  27.94,18.29 180 top
R3  2.2k  [0603]  23.88,14.35 180 top
R4  2.2k  [0603]  23.88,19.68 180 top
R5  10k  [0603]  23.88,30.23 180 top
R6  1k  [0603]  19.05,50.67 0 top
R7  10k  [0603]  23.88,31.75 0 top
R8  330  [0603]  31.24,55.12 270 top
R9  330  [0603]  13.46,55.12 90 top
R10  10k  [0603]  13.46,52.58 0 top
R11  100k  [0603]  32.51,48.13 180 top
R12  330  [0603]  31.5,42.42 90 top
R13  10k  [0603]  14.73,42.42 90 top
R14  100k  [0603]  14.73,46.23 90 top
R15  330  [0603]  13.21,42.42 90 top
R16  10k  [0603]  42.16,52.58 0 top
R17  1k  [0603]  47.75,50.67 0 top
R18  2.2k  [0603]  52.58,14.35 180 top
R19  2.2k  [0603]  52.58,19.68 180 top
R20  10k  [0603]  43.43,42.42 90 top
R21  330  [0603]  60.2,42.42 90 top
R22  330  [0603]  59.94,55.12 270 top
R23  330  [0603]  42.16,55.12 90 top
R24  100k  [0603]  61.21,48.13 180 top
R25  330  [0603]  41.91,42.42 90 top
R26  100k  [0603]  43.43,46.23 90 top
R27  10k  [0603]  52.58,31.75 0 top
R28  100k  [0603]  56.64,20.83 0 top
R29  10k  [0603]  56.64,18.29 180 top
R30  10k  [0603]  52.58,30.23 180 top
R31  10k  [0603]  70.87,52.58 0 top
R32  1k  [0603]  76.45,50.67 0 top
R33  2.2k  [0603]  81.28,14.35 180 top
R34  2.2k  [0603]  81.28,19.68 180 top
R35  10k  [0603]  72.14,42.42 90 top
R36  330  [0603]  88.9,42.42 90 top
R37  330  [0603]  88.65,55.12 270 top
R38  330  [0603]  70.87,55.12 90 top
R39  100k  [0603]  89.92,48.13 180 top
R40  330  [0603]  70.61,42.42 90 top
R41  100k  [0603]  72.14,46.23 90 top
R42  10k  [0603]  81.28,31.75 0 top
R43  100k  [0603]  85.34,20.83 0 top
R44  10k  [0603]  85.34,18.29 180 top
R45  10k  [0603]  81.28,30.23 180 top
R46  10k  [0603]  13.46,109.98 0 top
R47  1k  [0603]  19.05,108.08 0 top
R48  2.2k  [0603]  23.88,71.75 180 top
R49  2.2k  [0603]  23.88,77.09 180 top
R50  10k  [0603]  14.73,99.82 90 top
R51  330  [0603]  31.5,99.82 90 top
R52  330  [0603]  31.24,112.52 270 top
R53  330  [0603]  13.46,112.52 90 top
R54  100k  [0603]  32.51,105.54 180 top
R55  330  [0603]  13.21,99.82 90 top
R56  100k  [0603]  14.73,103.63 90 top
R57  10k  [0603]  23.88,89.15 0 top
R58  100k  [0603]  27.94,78.23 0 top
R59  10k  [0603]  27.94,75.69 180 top
R60  10k  [0603]  23.88,87.63 180 top
R61  10k  [0603]  42.16,109.98 0 top
R62  1k  [0603]  47.75,108.08 0 top
R63  2.2k  [0603]  52.58,71.75 180 top
R64  2.2k  [0603]  52.58,77.09 180 top
R65  10k  [0603]  43.43,99.82 90 top
R66  330  [0603]  60.2,99.82 90 top
R67  330  [0603]  59.94,112.52 270 top
R68  330  [0603]  42.16,112.52 90 top
R69  100k  [0603]  61.21,105.54 180 top
R70  330  [0603]  41.91,99.82 90 top
R71  100k  [0603]  43.43,103.63 90 top
R72  10k  [0603]  52.58,89.15 0 top
R73  100k  [0603]  56.64,78.23 0 top
R74  10k  [0603]  56.64,75.69 180 top
R75  10k  [0603]  52.58,87.63 180 top
R76  10k  [0603]  70.87,109.98 0 top
R77  1k  [0603]  76.45,108.08 0 top
R78  2.2k  [0603]  81.28,71.75 180 top
R79  2.2k  [0603]  81.28,77.09 180 top
R80  10k  [0603]  72.14,99.82 90 top
R81  330  [0603]  88.9,99.82 90 top
R82  330  [0603]  88.65,112.52 270 top
R83  330  [0603]  70.87,112.52 90 top
R84  100k  [0603]  89.92,105.54 180 top
R85  330  [0603]  70.61,99.82 90 top
R86  100k  [0603]  72.14,103.63 90 top
R87  10k  [0603]  81.28,89.15 0 top
R88  100k  [0603]  85.34,78.23 0 top
R89  10k  [0603]  85.34,75.69 180 top
R90  10k  [0603]  81.28,87.63 180 top
R91  10k  [0603]  13.46,167.39 0 top
R92  1k  [0603]  19.05,165.48 0 top
R93  2.2k  [0603]  23.88,129.16 180 top
R94  2.2k  [0603]  23.88,134.49 180 top
R95  10k  [0603]  14.73,157.23 90 top
R96  330  [0603]  31.5,157.23 90 top
R97  330  [0603]  31.24,169.93 270 top
R98  330  [0603]  13.46,169.93 90 top
R99  100k  [0603]  32.51,162.94 180 top
R100  330  [0603]  13.21,157.23 90 top
R101  100k  [0603]  14.73,161.04 90 top
R102  10k  [0603]  23.88,146.56 0 top
R103  100k  [0603]  27.94,135.64 0 top
R104  10k  [0603]  27.94,133.1 180 top
R105  10k  [0603]  23.88,145.03 180 top
R106  10k  [0603]  42.16,167.39 0 top
R107  1k  [0603]  47.75,165.48 0 top
R108  2.2k  [0603]  52.58,129.16 180 top
R109  2.2k  [0603]  52.58,134.49 180 top
R110  10k  [0603]  43.43,157.23 90 top
R111  330  [0603]  60.2,157.23 90 top
R112  330  [0603]  59.94,169.93 270 top
R113  330  [0603]  42.16,169.93 90 top
R114  100k  [0603]  61.21,162.94 180 top
R115  330  [0603]  41.91,157.23 90 top
R116  100k  [0603]  43.43,161.04 90 top
R117  10k  [0603]  52.58,146.56 0 top
R118  100k  [0603]  56.64,135.64 0 top
R119  10k  [0603]  56.64,133.1 180 top
R120  10k  [0603]  52.58,145.03 180 top
R121  10k  [0603]  70.87,167.39 0 top
R122  1k  [0603]  76.45,165.48 0 top
R123  2.2k  [0603]  81.28,129.16 180 top
R124  2.2k  [0603]  81.28,134.49 180 top
R125  10k  [0603]  72.14,157.23 90 top
R126  330  [0603]  88.9,157.23 90 top
R127  330  [0603]  88.65,169.93 270 top
R128  330  [0603]  70.87,169.93 90 top
R129  100k  [0603]  89.92,162.94 180 top
R130  330  [0603]  70.61,157.23 90 top
R131  100k  [0603]  72.14,161.04 90 top
R132  10k  [0603]  81.28,146.56 0 top
R133  100k  [0603]  85.34,135.64 0 top
R134  10k  [0603]  85.34,133.1 180 top
R135  10k  [0603]  81.28,145.03 180 top
R136  10k  [0603]  13.46,224.79 0 top
R137  1k  [0603]  19.05,222.88 0 top
R138  2.2k  [0603]  23.88,186.56 180 top
R139  2.2k  [0603]  23.88,191.9 180 top
R140  10k  [0603]  14.73,214.63 90 top
R141  330  [0603]  31.5,214.63 90 top
R142  330  [0603]  31.24,227.33 270 top
R143  330  [0603]  13.46,227.33 90 top
R144  100k  [0603]  32.51,220.34 180 top
R145  330  [0603]  13.21,214.63 90 top
R146  100k  [0603]  14.73,218.44 90 top
R147  10k  [0603]  23.88,203.96 0 top
R148  100k  [0603]  27.94,193.04 0 top
R149  10k  [0603]  27.94,190.5 180 top
R150  10k  [0603]  23.88,202.44 180 top
R151  10k  [0603]  42.16,224.79 0 top
R152  1k  [0603]  47.75,222.88 0 top
R153  2.2k  [0603]  52.58,186.56 180 top
R154  2.2k  [0603]  52.58,191.9 180 top
R155  10k  [0603]  43.43,214.63 90 top
R156  330  [0603]  60.2,214.63 90 top
R157  330  [0603]  59.94,227.33 270 top
R158  330  [0603]  42.16,227.33 90 top
R159  100k  [0603]  61.21,220.34 180 top
R160  330  [0603]  41.91,214.63 90 top
R161  100k  [0603]  43.43,218.44 90 top
R162  10k  [0603]  52.58,203.96 0 top
R163  100k  [0603]  56.64,193.04 0 top
R164  10k  [0603]  56.64,190.5 180 top
R165  10k  [0603]  52.58,202.44 180 top
R166  10k  [0603]  70.87,224.79 0 top
R167  1k  [0603]  76.45,222.88 0 top
R168  2.2k  [0603]  81.28,186.56 180 top
R169  2.2k  [0603]  81.28,191.9 180 top
R170  10k  [0603]  72.14,214.63 90 top
R171  330  [0603]  88.9,214.63 90 top
R172  330  [0603]  88.65,227.33 270 top
R173  330  [0603]  70.87,227.33 90 top
R174  100k  [0603]  89.92,220.34 180 top
R175  330  [0603]  70.61,214.63 90 top
R176  100k  [0603]  72.14,218.44 90 top
R177  10k  [0603]  81.28,203.96 0 top
R178  100k  [0603]  85.34,193.04 0 top
R179  10k  [0603]  85.34,190.5 180 top
R180  10k  [0603]  81.28,202.44 180 top
S1  RESET  [TACTILE_SWITCH_SMD_4.6X2.8MM]  13.59,50.04 0 top
S2  BTN2  [TACTILE_SWITCH_SMD_4.6X2.8MM]  13.59,38.73 0 top
S3  RESET  [TACTILE_SWITCH_SMD_4.6X2.8MM]  42.29,50.04 0 top
S4  BTN2  [TACTILE_SWITCH_SMD_4.6X2.8MM]  42.29,38.73 0 top
S5  RESET  [TACTILE_SWITCH_SMD_4.6X2.8MM]  70.99,50.04 0 top
S6  BTN2  [TACTILE_SWITCH_SMD_4.6X2.8MM]  70.99,38.73 0 top
S7  RESET  [TACTILE_SWITCH_SMD_4.6X2.8MM]  13.59,107.44 0 top
S8  BTN2  [TACTILE_SWITCH_SMD_4.6X2.8MM]  13.59,96.14 0 top
S9  RESET  [TACTILE_SWITCH_SMD_4.6X2.8MM]  42.29,107.44 0 top
S10  BTN2  [TACTILE_SWITCH_SMD_4.6X2.8MM]  42.29,96.14 0 top
S11  RESET  [TACTILE_SWITCH_SMD_4.6X2.8MM]  70.99,107.44 0 top
S12  BTN2  [TACTILE_SWITCH_SMD_4.6X2.8MM]  70.99,96.14 0 top
S13  RESET  [TACTILE_SWITCH_SMD_4.6X2.8MM]  13.59,164.85 0 top
S14  BTN2  [TACTILE_SWITCH_SMD_4.6X2.8MM]  13.59,153.54 0 top
S15  RESET  [TACTILE_SWITCH_SMD_4.6X2.8MM]  42.29,164.85 0 top
S16  BTN2  [TACTILE_SWITCH_SMD_4.6X2.8MM]  42.29,153.54 0 top
S17  RESET  [TACTILE_SWITCH_SMD_4.6X2.8MM]  70.99,164.85 0 top
S18  BTN2  [TACTILE_SWITCH_SMD_4.6X2.8MM]  70.99,153.54 0 top
S19  RESET  [TACTILE_SWITCH_SMD_4.6X2.8MM]  13.59,222.25 0 top
S20  BTN2  [TACTILE_SWITCH_SMD_4.6X2.8MM]  13.59,210.95 0 top
S21  RESET  [TACTILE_SWITCH_SMD_4.6X2.8MM]  42.29,222.25 0 top
S22  BTN2  [TACTILE_SWITCH_SMD_4.6X2.8MM]  42.29,210.95 0 top
S23  RESET  [TACTILE_SWITCH_SMD_4.6X2.8MM]  70.99,222.25 0 top
S24  BTN2  [TACTILE_SWITCH_SMD_4.6X2.8MM]  70.99,210.95 0 top
TP1  TP-SWDIO  [PAD.03X.05]  15.14,34.11 0 bottom
TP2  TP-SWCLK  [PAD.03X.05]  17.14,34.11 0 bottom
TP3  TP-!RESET!  [PAD.03X.05]  19.14,34.11 0 bottom
TP4  TP-3.3V  [PAD.03X.05]  11.14,34.11 0 bottom
TP5  TP-GND  [PAD.03X.05]  13.14,34.11 0 bottom
TP6  TP-GND  [PAD.03X.05]  33.03,33.86 0 bottom
TP7  TP-GND  [PAD.03X.05]  33.03,37.86 0 bottom
TP8  TP-GND  [PAD.03X.05]  33.03,39.86 0 bottom
TP9  TP-GND  [PAD.03X.05]  33.03,35.86 0 bottom
TP10  TP-SWDIO  [PAD.03X.05]  43.85,34.11 0 bottom
TP11  TP-SWCLK  [PAD.03X.05]  45.85,34.11 0 bottom
TP12  TP-!RESET!  [PAD.03X.05]  47.85,34.11 0 bottom
TP13  TP-3.3V  [PAD.03X.05]  39.85,34.11 0 bottom
TP14  TP-GND  [PAD.03X.05]  41.85,34.11 0 bottom
TP15  TP-GND  [PAD.03X.05]  61.73,33.86 0 bottom
TP16  TP-GND  [PAD.03X.05]  61.73,37.86 0 bottom
TP17  TP-GND  [PAD.03X.05]  61.73,39.86 0 bottom
TP18  TP-GND  [PAD.03X.05]  61.73,35.86 0 bottom
TP19  TP-SWDIO  [PAD.03X.05]  72.55,34.11 0 bottom
TP20  TP-SWCLK  [PAD.03X.05]  74.55,34.11 0 bottom
TP21  TP-!RESET!  [PAD.03X.05]  76.55,34.11 0 bottom
TP22  TP-3.3V  [PAD.03X.05]  68.55,34.11 0 bottom
TP23  TP-GND  [PAD.03X.05]  70.55,34.11 0 bottom
TP24  TP-GND  [PAD.03X.05]  90.44,33.86 0 bottom
TP25  TP-GND  [PAD.03X.05]  90.44,37.86 0 bottom
TP26  TP-GND  [PAD.03X.05]  90.44,39.86 0 bottom
TP27  TP-GND  [PAD.03X.05]  90.44,35.86 0 bottom
TP28  TP-SWDIO  [PAD.03X.05]  15.14,91.52 0 bottom
TP29  TP-SWCLK  [PAD.03X.05]  17.14,91.52 0 bottom
TP30  TP-!RESET!  [PAD.03X.05]  19.14,91.52 0 bottom
TP31  TP-3.3V  [PAD.03X.05]  11.14,91.52 0 bottom
TP32  TP-GND  [PAD.03X.05]  13.14,91.52 0 bottom
TP33  TP-GND  [PAD.03X.05]  33.03,91.26 0 bottom
TP34  TP-GND  [PAD.03X.05]  33.03,95.26 0 bottom
TP35  TP-GND  [PAD.03X.05]  33.03,97.26 0 bottom
TP36  TP-GND  [PAD.03X.05]  33.03,93.26 0 bottom
TP37  TP-SWDIO  [PAD.03X.05]  43.85,91.52 0 bottom
TP38  TP-SWCLK  [PAD.03X.05]  45.85,91.52 0 bottom
TP39  TP-!RESET!  [PAD.03X.05]  47.85,91.52 0 bottom
TP40  TP-3.3V  [PAD.03X.05]  39.85,91.52 0 bottom
TP41  TP-GND  [PAD.03X.05]  41.85,91.52 0 bottom
TP42  TP-GND  [PAD.03X.05]  61.73,91.26 0 bottom
TP43  TP-GND  [PAD.03X.05]  61.73,95.26 0 bottom
TP44  TP-GND  [PAD.03X.05]  61.73,97.26 0 bottom
TP45  TP-GND  [PAD.03X.05]  61.73,93.26 0 bottom
TP46  TP-SWDIO  [PAD.03X.05]  72.55,91.52 0 bottom
TP47  TP-SWCLK  [PAD.03X.05]  74.55,91.52 0 bottom
TP48  TP-!RESET!  [PAD.03X.05]  76.55,91.52 0 bottom
TP49  TP-3.3V  [PAD.03X.05]  68.55,91.52 0 bottom
TP50  TP-GND  [PAD.03X.05]  70.55,91.52 0 bottom
TP51  TP-GND  [PAD.03X.05]  90.44,91.26 0 bottom
TP52  TP-GND  [PAD.03X.05]  90.44,95.26 0 bottom
TP53  TP-GND  [PAD.03X.05]  90.44,97.26 0 bottom
TP54  TP-GND  [PAD.03X.05]  90.44,93.26 0 bottom
TP55  TP-SWDIO  [PAD.03X.05]  15.14,148.92 0 bottom
TP56  TP-SWCLK  [PAD.03X.05]  17.14,148.92 0 bottom
TP57  TP-!RESET!  [PAD.03X.05]  19.14,148.92 0 bottom
TP58  TP-3.3V  [PAD.03X.05]  11.14,148.92 0 bottom
TP59  TP-GND  [PAD.03X.05]  13.14,148.92 0 bottom
TP60  TP-GND  [PAD.03X.05]  33.03,148.67 0 bottom
TP61  TP-GND  [PAD.03X.05]  33.03,152.67 0 bottom
TP62  TP-GND  [PAD.03X.05]  33.03,154.67 0 bottom
TP63  TP-GND  [PAD.03X.05]  33.03,150.67 0 bottom
TP64  TP-SWDIO  [PAD.03X.05]  43.85,148.92 0 bottom
TP65  TP-SWCLK  [PAD.03X.05]  45.85,148.92 0 bottom
TP66  TP-!RESET!  [PAD.03X.05]  47.85,148.92 0 bottom
TP67  TP-3.3V  [PAD.03X.05]  39.85,148.92 0 bottom
TP68  TP-GND  [PAD.03X.05]  41.85,148.92 0 bottom
TP69  TP-GND  [PAD.03X.05]  61.73,148.67 0 bottom
TP70  TP-GND  [PAD.03X.05]  61.73,152.67 0 bottom
TP71  TP-GND  [PAD.03X.05]  61.73,154.67 0 bottom
TP72  TP-GND  [PAD.03X.05]  61.73,150.67 0 bottom
TP73  TP-SWDIO  [PAD.03X.05]  72.55,148.92 0 bottom
TP74  TP-SWCLK  [PAD.03X.05]  74.55,148.92 0 bottom
TP75  TP-!RESET!  [PAD.03X.05]  76.55,148.92 0 bottom
TP76  TP-3.3V  [PAD.03X.05]  68.55,148.92 0 bottom
TP77  TP-GND  [PAD.03X.05]  70.55,148.92 0 bottom
TP78  TP-GND  [PAD.03X.05]  90.44,148.67 0 bottom
TP79  TP-GND  [PAD.03X.05]  90.44,152.67 0 bottom
TP80  TP-GND  [PAD.03X.05]  90.44,154.67 0 bottom
TP81  TP-GND  [PAD.03X.05]  90.44,150.67 0 bottom
TP82  TP-SWDIO  [PAD.03X.05]  15.14,206.32 0 bottom
TP83  TP-SWCLK  [PAD.03X.05]  17.14,206.32 0 bottom
TP84  TP-!RESET!  [PAD.03X.05]  19.14,206.32 0 bottom
TP85  TP-3.3V  [PAD.03X.05]  11.14,206.32 0 bottom
TP86  TP-GND  [PAD.03X.05]  13.14,206.32 0 bottom
TP87  TP-GND  [PAD.03X.05]  33.03,206.07 0 bottom
TP88  TP-GND  [PAD.03X.05]  33.03,210.07 0 bottom
TP89  TP-GND  [PAD.03X.05]  33.03,212.07 0 bottom
TP90  TP-GND  [PAD.03X.05]  33.03,208.07 0 bottom
TP91  TP-SWDIO  [PAD.03X.05]  43.85,206.32 0 bottom
TP92  TP-SWCLK  [PAD.03X.05]  45.85,206.32 0 bottom
TP93  TP-!RESET!  [PAD.03X.05]  47.85,206.32 0 bottom
TP94  TP-3.3V  [PAD.03X.05]  39.85,206.32 0 bottom
TP95  TP-GND  [PAD.03X.05]  41.85,206.32 0 bottom
TP96  TP-GND  [PAD.03X.05]  61.73,206.07 0 bottom
TP97  TP-GND  [PAD.03X.05]  61.73,210.07 0 bottom
TP98  TP-GND  [PAD.03X.05]  61.73,212.07 0 bottom
TP99  TP-GND  [PAD.03X.05]  61.73,208.07 0 bottom
TP100  TP-SWDIO  [PAD.03X.05]  72.55,206.32 0 bottom
TP101  TP-SWCLK  [PAD.03X.05]  74.55,206.32 0 bottom
TP102  TP-!RESET!  [PAD.03X.05]  76.55,206.32 0 bottom
TP103  TP-3.3V  [PAD.03X.05]  68.55,206.32 0 bottom
TP104  TP-GND  [PAD.03X.05]  70.55,206.32 0 bottom
TP105  TP-GND  [PAD.03X.05]  90.44,206.07 0 bottom
TP106  TP-GND  [PAD.03X.05]  90.44,210.07 0 bottom
TP107  TP-GND  [PAD.03X.05]  90.44,212.07 0 bottom
TP108  TP-GND  [PAD.03X.05]  90.44,208.07 0 bottom
U1  AP2151  [SOT23-5]  31.24,19.56 0 top
U2  ATSAMD21G-A  [TQFP-48]  23.62,42.42 90 top
U3  3.3V  [SOT23-5]  19.18,53.85 90 top
U4  W25Q32FV  [SOIC-8]  29.97,30.35 270 top
U5  W25Q32FV  [SOIC-8]  58.67,30.35 270 top
U6  3.3V  [SOT23-5]  47.88,53.85 90 top
U7  ATSAMD21G-A  [TQFP-48]  52.32,42.42 90 top
U8  AP2151  [SOT23-5]  59.94,19.56 0 top
U9  W25Q32FV  [SOIC-8]  87.38,30.35 270 top
U10  3.3V  [SOT23-5]  76.58,53.85 90 top
U11  ATSAMD21G-A  [TQFP-48]  81.03,42.42 90 top
U12  AP2151  [SOT23-5]  88.65,19.56 0 top
U13  W25Q32FV  [SOIC-8]  29.97,87.76 270 top
U14  3.3V  [SOT23-5]  19.18,111.25 90 top
U15  ATSAMD21G-A  [TQFP-48]  23.62,99.82 90 top
U16  AP2151  [SOT23-5]  31.24,76.96 0 top
U17  W25Q32FV  [SOIC-8]  58.67,87.76 270 top
U18  3.3V  [SOT23-5]  47.88,111.25 90 top
U19  ATSAMD21G-A  [TQFP-48]  52.32,99.82 90 top
U20  AP2151  [SOT23-5]  59.94,76.96 0 top
U21  W25Q32FV  [SOIC-8]  87.38,87.76 270 top
U22  3.3V  [SOT23-5]  76.58,111.25 90 top
U23  ATSAMD21G-A  [TQFP-48]  81.03,99.82 90 top
U24  AP2151  [SOT23-5]  88.65,76.96 0 top
U25  W25Q32FV  [SOIC-8]  29.97,145.16 270 top
U26  3.3V  [SOT23-5]  19.18,168.66 90 top
U27  ATSAMD21G-A  [TQFP-48]  23.62,157.23 90 top
U28  AP2151  [SOT23-5]  31.24,134.37 0 top
U29  W25Q32FV  [SOIC-8]  58.67,145.16 270 top
U30  3.3V  [SOT23-5]  47.88,168.66 90 top
U31  ATSAMD21G-A  [TQFP-48]  52.32,157.23 90 top
U32  AP2151  [SOT23-5]  59.94,134.37 0 top
U33  W25Q32FV  [SOIC-8]  87.38,145.16 270 top
U34  3.3V  [SOT23-5]  76.58,168.66 90 top
U35  ATSAMD21G-A  [TQFP-48]  81.03,157.23 90 top
U36  AP2151  [SOT23-5]  88.65,134.37 0 top
U37  W25Q32FV  [SOIC-8]  29.97,202.56 270 top
U38  3.3V  [SOT23-5]  19.18,226.06 90 top
U39  ATSAMD21G-A  [TQFP-48]  23.62,214.63 90 top
U40  AP2151  [SOT23-5]  31.24,191.77 0 top
U41  W25Q32FV  [SOIC-8]  58.67,202.56 270 top
U42  3.3V  [SOT23-5]  47.88,226.06 90 top
U43  ATSAMD21G-A  [TQFP-48]  52.32,214.63 90 top
U44  AP2151  [SOT23-5]  59.94,191.77 0 top
U45  W25Q32FV  [SOIC-8]  87.38,202.56 270 top
U46  3.3V  [SOT23-5]  76.58,226.06 90 top
U47  ATSAMD21G-A  [TQFP-48]  81.03,214.63 90 top
U48  AP2151  [SOT23-5]  88.65,191.77 0 top
Y1  32.768kHz  [CRYSTAL-SMD-3.2X1.5MM]  16,35.94 180 top
Y2  32.768kHz  [CRYSTAL-SMD-3.2X1.5MM]  44.7,35.94 180 top
Y3  32.768kHz  [CRYSTAL-SMD-3.2X1.5MM]  73.41,35.94 180 top
Y4  32.768kHz  [CRYSTAL-SMD-3.2X1.5MM]  16,93.34 180 top
Y5  32.768kHz  [CRYSTAL-SMD-3.2X1.5MM]  44.7,93.34 180 top
Y6  32.768kHz  [CRYSTAL-SMD-3.2X1.5MM]  73.41,93.34 180 top
Y7  32.768kHz  [CRYSTAL-SMD-3.2X1.5MM]  16,150.75 180 top
Y8  32.768kHz  [CRYSTAL-SMD-3.2X1.5MM]  44.7,150.75 180 top
Y9  32.768kHz  [CRYSTAL-SMD-3.2X1.5MM]  73.41,150.75 180 top
Y10  32.768kHz  [CRYSTAL-SMD-3.2X1.5MM]  16,208.15 180 top
Y11  32.768kHz  [CRYSTAL-SMD-3.2X1.5MM]  44.7,208.15 180 top
Y12  32.768kHz  [CRYSTAL-SMD-3.2X1.5MM]  73.41,208.15 180 top

## Library data of the parts
C1 C27 C43 C59 C75 C91 C107 C123 C139 C155 C171 C187 = SparkFun-Capacitors; PROD_ID: CAP-11330
C2-C6 C10 C12 C14 C19-C26 C35-C42 C51-C58 C67-C74 C83-C90 C99-C106 C115-C122 C131-C138 C147-C154 C163-C170 C179-C186 = SparkFun-Capacitors; PROD_ID: CAP-00810
C7 C28 C44 C60 C76 C92 C108 C124 C140 C156 C172 C188 = SparkFun-Capacitors; PROD_ID: CAP-00811
C8 C17 C33 C49 C65 C81 C97 C113 C129 C145 C161 C177 = SparkFun-Capacitors; PROD_ID: CAP-11625
C9 C18 C34 C50 C66 C82 C98 C114 C130 C146 C162 C178 = SparkFun-Capacitors; PROD_ID: CAP-07888
C11 C30 C46 C62 C78 C94 C110 C126 C142 C158 C174 C190 = SparkFun-Capacitors; PROD_ID: CAP-08913
C13 C29 C45 C61 C77 C93 C109 C125 C141 C157 C173 C189 = SparkFun-Capacitors; PROD_ID: CAP-07822
C15 C16 C31 C32 C47 C48 C63 C64 C79 C80 C95 C96 C111 C112 C127 C128 C143 C144 C159 C160 C175 C176 C191 C192 = SparkFun-Capacitors; PROD_ID: CAP-07881
D1 D2 D7 D12 D13 D18 D22 D23 D28 D32 D33 D38 D42 D43 D48 D52 D53 D58 D62 D63 D68 D72 D73 D78 D82 D83 D88 D92 D93 D98 D102 D103 D108 D112 D113 D118 = SparkFun-DiscreteSemi; PROD_ID: DIO-12501
D3 D11 D21 D31 D41 D51 D61 D71 D81 D91 D101 D111 = SparkFun-LED; PROD_ID: DIO-00819
D4 D5 D19 D20 D29 D30 D39 D40 D49 D50 D59 D60 D69 D70 D79 D80 D89 D90 D99 D100 D109 D110 D119 D120 = SparkFun-DiscreteSemi; PROD_ID: DIO-10955
D6 D10 D14 D16 D24 D26 D34 D36 D44 D46 D54 D56 D64 D66 D74 D76 D84 D86 D94 D96 D104 D106 D114 D116 = SparkFun-LED; PROD_ID: DIO-00821
D8 D17 D27 D37 D47 D57 D67 D77 D87 D97 D107 D117 = SparkFun-LED; PROD_ID: DIO-09003
D9 D15 D25 D35 D45 D55 D65 D75 D85 D95 D105 D115 = SparkFun-LED; PROD_ID: DIO-08575
E$1 = SparkFun-Retired
E$4 E$7 FD1-FD24 LOGO1-LOGO36 = SparkFun-Aesthetics
F1-F12 = SparkFun-PowerIC; PROD_ID: RES-11150
FB1-FB12 = SparkFun-Inductors; PROD_ID: NDUC-07859
H1-H48 = SparkFun-Hardware
J1 J6 J9 J12 J15 J18 J21 J24 J27 J30 J33 J36 = SparkFun-Connectors; PROD_ID: CONN-11752
J2-J5 J7 J8 J10 J11 J13 J14 J16 J17 J19 J20 J22 J23 J25 J26 J28 J29 J31 J32 J34 J35 = SparkFun-Connectors; PROD_ID: CONN-10676; SF_ID: PRT-12639
JP1-JP12 = SparkFun-Jumpers
Q1-Q24 = SparkFun-DiscreteSemi; PROD_ID: TRANS-11151
R1 R11 R14 R24 R26 R28 R39 R41 R43 R54 R56 R58 R69 R71 R73 R84 R86 R88 R99 R101 R103 R114 R116 R118 R129 R131 R133 R144 R146 R148 R159 R161 R163 R174 R176 R178 = SparkFun-Resistors; PROD_ID: RES-07828
R2 R5 R7 R10 R13 R16 R20 R27 R29-R31 R35 R42 R44-R46 R50 R57 R59-R61 R65 R72 R74-R76 R80 R87 R89-R91 R95 R102 R104-R106 R110 R117 R119-R121 R125 R132 R134-R136 R140 R147 R149-R151 R155 R162 R164-R166 R170 R177 R179 R180 = SparkFun-Resistors; PROD_ID: RES-00824
R3 R4 R18 R19 R33 R34 R48 R49 R63 R64 R78 R79 R93 R94 R108 R109 R123 R124 R138 R139 R153 R154 R168 R169 = SparkFun-Resistors; PROD_ID: RES-08272
R6 R17 R32 R47 R62 R77 R92 R107 R122 R137 R152 R167 = SparkFun-Resistors; PROD_ID: RES-07856
R8 R9 R12 R15 R21-R23 R25 R36-R38 R40 R51-R53 R55 R66-R68 R70 R81-R83 R85 R96-R98 R100 R111-R113 R115 R126-R128 R130 R141-R143 R145 R156-R158 R160 R171-R173 R175 = SparkFun-Resistors; PROD_ID: RES-00818
S1-S24 = SparkFun-Switches; PROD_ID: SWCH-13065
TP1-TP108 = SparkFun-Connectors
U1 U8 U12 U16 U20 U24 U28 U32 U36 U40 U44 U48 = spectacle-director-temp; PROD_ID: IC-13587
U2 U7 U11 U15 U19 U23 U27 U31 U35 U39 U43 U47 = SparkFun-IC-Microcontroller; PROD_ID: IC-13064
U3 U6 U10 U14 U18 U22 U26 U30 U34 U38 U42 U46 = SparkFun-IC-Power; PROD_ID: VREG-12457
U4 U5 U9 U13 U17 U21 U25 U29 U33 U37 U41 U45 = SparkFun-IC-Memory; PROD_ID: IC-13229
Y1-Y12 = SparkFun-Clocks; PROD_ID: XTAL-13062